# Altium PCB 14pin_2x7_1.27mm_to_2.54mm.PcbDoc
Units mm, origin at the board's own origin, x right, y up, seen from the top; angles counter-clockwise.
Board outline 25.65 x 25.91 mm, 2 copper layers (Top Layer, Bottom Layer); 2 components, 14 nets, 28 pads, 12 vias.
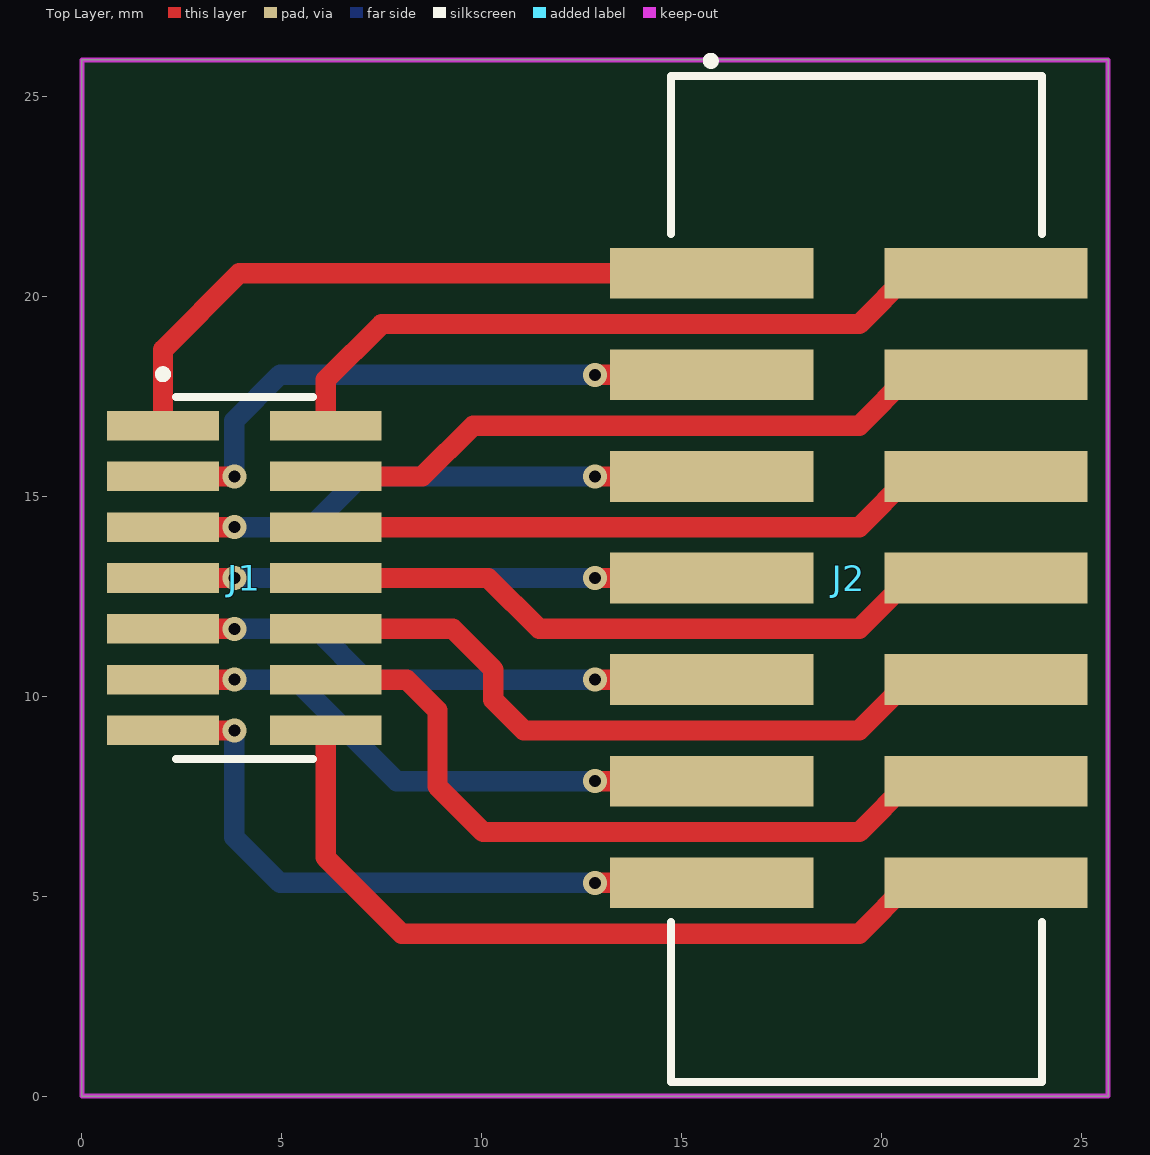
[diagram p0: Top Layer view]
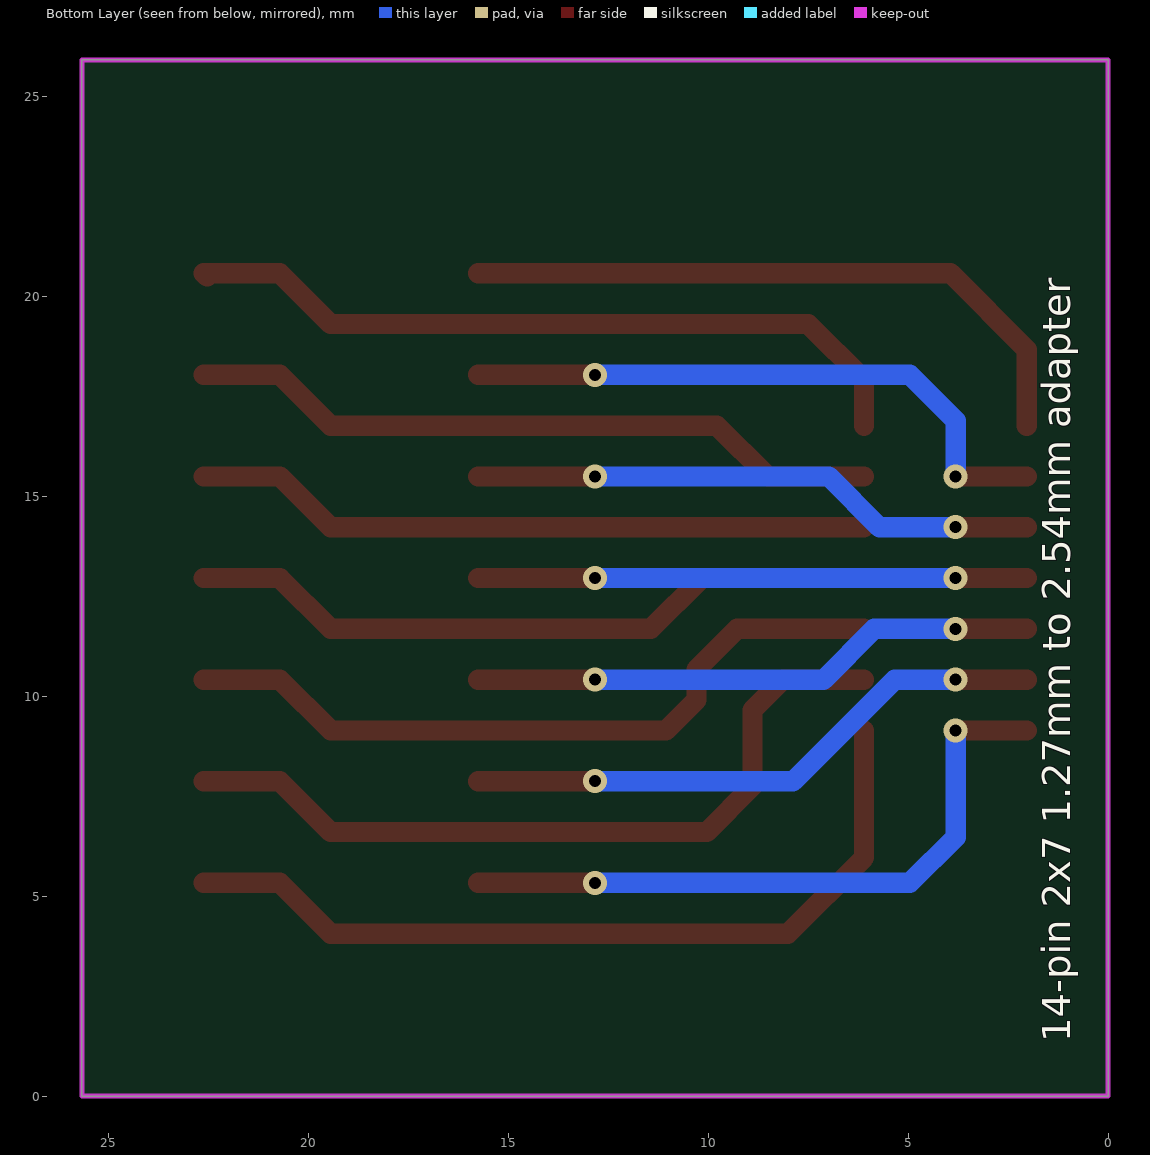
[diagram p1: Bottom Layer view, seen from below]

## Layer stack, top to bottom
Top Solder: solder mask 0.0102, Solder Resist, Dk 3.5
Top Layer: signal copper 0.0356
Dielectric 1: dielectric 0.32, FR-4, Dk 4.8
Bottom Layer: signal copper 0.0356
Bottom Solder: solder mask 0.0102, Solder Resist, Dk 3.5

## Board outline
0,0 0,25.908 25.654,25.908 25.654,0

## Design rules (kind name [scope] priority, off if disabled: settings)
Clearance [All] p1: gap=0.254 ignorepadtopadclearanceinfootprint=FALSE except(0: Arc-Hole Track-Hole SMDPad-Hole THPad-Hole Via-Hole Fill-Hole Poly-Hole Region-Hole Text-Hole)
PolygonConnect [All] p1: connectstyle=Relief reliefconductorwidth=0.254 reliefentries=4 polygonreliefangle="90 Angle" airgapwidth=0.254
RoutingVias [All] p1: holewidth=0.3 width=0.6 viastyle="Through Hole" minholewidth=0.3 minwidth=0.6 maxholewidth=6 maxwidth=6.3
SilkToSolderMaskClearance [IsPad] p1: minsilkscreentomaskgap=0.127 clearancetoexposedcopper=TRUE
SolderMaskExpansion [All] p1: expansion=0.102 istentingtop=FALSE
Width [All] p1: maxlimit=1.27 minlimit=0.254 preferedwidth=0.508 minimp=50.000000 maximp=50.000000 favimp=50.000000
29 further rules are at their usual default settings.

## Components (designator, comment, footprint, x,y, rotation, side; value= is the part's Value field where it differs from the comment)
J1 "CON SMD 14-PIN 2-ROW 1.27" "SMD HEADER 2x7 1.27" 4.064,12.954 r270 top
J2 "CON SMD 14-PIN 2-ROW 2.54 WIDE" "SMD HEADER 2x7 2.54 WIDE" 19.177,12.954 r270 top

## Footprints (in the part's own frame and the unit in brackets; to place one, negate y for a bottom-side part, rotate by r counter-clockwise, add the part's x,y. Pads: shape width x height; smd on the part's side, far side on the other; paste and mask are expansions set on the pad)
"SMD HEADER 2x7 1.27" [mm]
  rect 0.74x2.79 smd: 1(-3.81,-2.035) 2(-3.81,2.035) 3(-2.54,-2.035) 4(-2.54,2.035) 5(-1.27,-2.035) 6(-1.27,2.035) 7(0,-2.035) 8(0,2.035) 9(1.27,-2.035) 10(1.27,2.035) 11(2.54,-2.035) 12(2.54,2.035) 13(3.81,-2.035) 14(3.81,2.035)
  silkscreen extent -5.19,-2.13 4.53,1.72, body extent -4.44,-2.92 4.45,2.92, height 4.57
"SMD HEADER 2x7 2.54 WIDE" [mil]
  rect 50x200 smd: 1(-300,-135) 2(-300,135) 3(-200,-135) 4(-200,135) 5(-100,-135) 6(-100,135) 7(0,-135) 8(0,135) 9(100,-135) 10(100,135) 11(200,-135) 12(200,135) 13(300,-135) 14(300,135)
  silkscreen extent -513,-175 496,190, body extent -500,-220 500,220, height 449

## Part data
J1: "M50-3600742"
J2: "HTST-107-01-SM-DV-P"

## Via types
v1: diameter 0.6, hole 0.3, Top Layer to Bottom Layer, tented both sides, 12 vias

## Nets (pads, with @x,y where several pads share a name; then routed paths per layer and width w, separated by ;. In a path a pad name is that pad's centre, name@x,y a point inside that pad or via, vN(x,y) a via of type N, cw(c..) or ccw(c..) an arc to the next point about the centre after c; other vN are vias at no path point)
NetJ1_1: J1.1 J2.1 | length 16.4
  Top Layer w0.508: J1.1 2.029,18.666 3.937,20.574 J2.1
NetJ1_2: J1.2 J2.2 | length 18.9
  Top Layer w0.508: J1.2 6.099,17.91 7.493,19.304 19.431,19.304 20.701,20.574 J2.2 J2.2@22.523,20.491
NetJ1_3: J1.3 J2.3 | length 15.6
  Top Layer w0.508: J1.3 v1(3.81,15.494) ; v1(12.827,18.034) J2.3
  Bottom Layer w0.508: v1(3.81,15.494) 3.81,16.891 4.953,18.034 v1(12.827,18.034)
NetJ1_4: J1.4 J2.4 | length 17.6
  Top Layer w0.508: J1.4 8.509,15.494 9.779,16.764 19.431,16.764 20.701,18.034 J2.4
NetJ1_5: J1.5 J2.5 | length 14.2
  Top Layer w0.508: J1.5 v1(3.81,14.224) ; v1(12.827,15.494) J2.5
  Bottom Layer w0.508: v1(3.81,14.224) 5.715,14.224 6.985,15.494 v1(12.827,15.494)
NetJ1_6: J1.6 J2.6 | length 17
  Top Layer w0.508: J1.6 19.431,14.224 20.701,15.494 J2.6
NetJ1_7: J1.7 J2.7 | length 13.7
  Top Layer w0.508: J1.7 v1(3.81,12.954) ; v1(12.827,12.954) J2.7
  Bottom Layer w0.508: v1(3.81,12.954) v1(12.827,12.954)
NetJ1_8: J1.8 J2.8 | length 17.6
  Top Layer w0.508: J1.8 10.16,12.954 11.43,11.684 19.431,11.684 20.701,12.954 J2.8
NetJ1_9: J1.9 J2.9 | length 14.2
  Top Layer w0.508: J1.9 v1(3.81,11.684) ; v1(12.827,10.414) J2.9
  Bottom Layer w0.508: v1(3.81,11.684) 5.842,11.684 7.112,10.414 v1(12.827,10.414)
NetJ1_10: J1.10 J2.10 | length 18.5
  Top Layer w0.508: J1.10 9.271,11.684 10.287,10.668 10.287,9.906 11.049,9.144 19.431,9.144 20.701,10.414 J2.10
NetJ1_11: J1.11 J2.11 | length 14.8
  Top Layer w0.508: J1.11 v1(3.81,10.414) ; v1(12.827,7.874) J2.11
  Bottom Layer w0.508: v1(3.81,10.414) 5.334,10.414 7.874,7.874 v1(12.827,7.874)
NetJ1_12: J1.12 J2.12 | length 19.7
  Top Layer w0.508: J1.12 8.128,10.414 8.89,9.652 8.89,7.747 10.033,6.604 19.431,6.604 20.701,7.874 J2.12
NetJ1_13: J1.13 J2.13 | length 16.9
  Top Layer w0.508: J1.13 v1(3.81,9.144) ; v1(12.827,5.334) J2.13
  Bottom Layer w0.508: v1(3.81,9.144) 3.81,6.477 4.953,5.334 v1(12.827,5.334)
NetJ1_14: J1.14 J2.14 | length 21
  Top Layer w0.508: J1.14 6.099,5.966 8.001,4.064 19.431,4.064 20.701,5.334 J2.14

## Keep-outs
Keep-Out Layer:
  the board outline again, w0.127

## Silkscreen, mask and mechanical layers (free items; w line width, h text height)
Bottom Overlay:
  text "14-pin 2x7 1.27mm to 2.54mm adapter" at 0.941,1.343 h0.7 r270